# Altium PCB MAB17_sem_malha.PcbDoc (part 1 of 2)
Units mil, origin at the board's own origin, x right, y up, seen from the top; angles counter-clockwise.
Board outline 6100 x 4200 mil, 2 copper layers (Top Layer, Bottom Layer); 83 components, 57 nets, 272 pads, 21 vias.
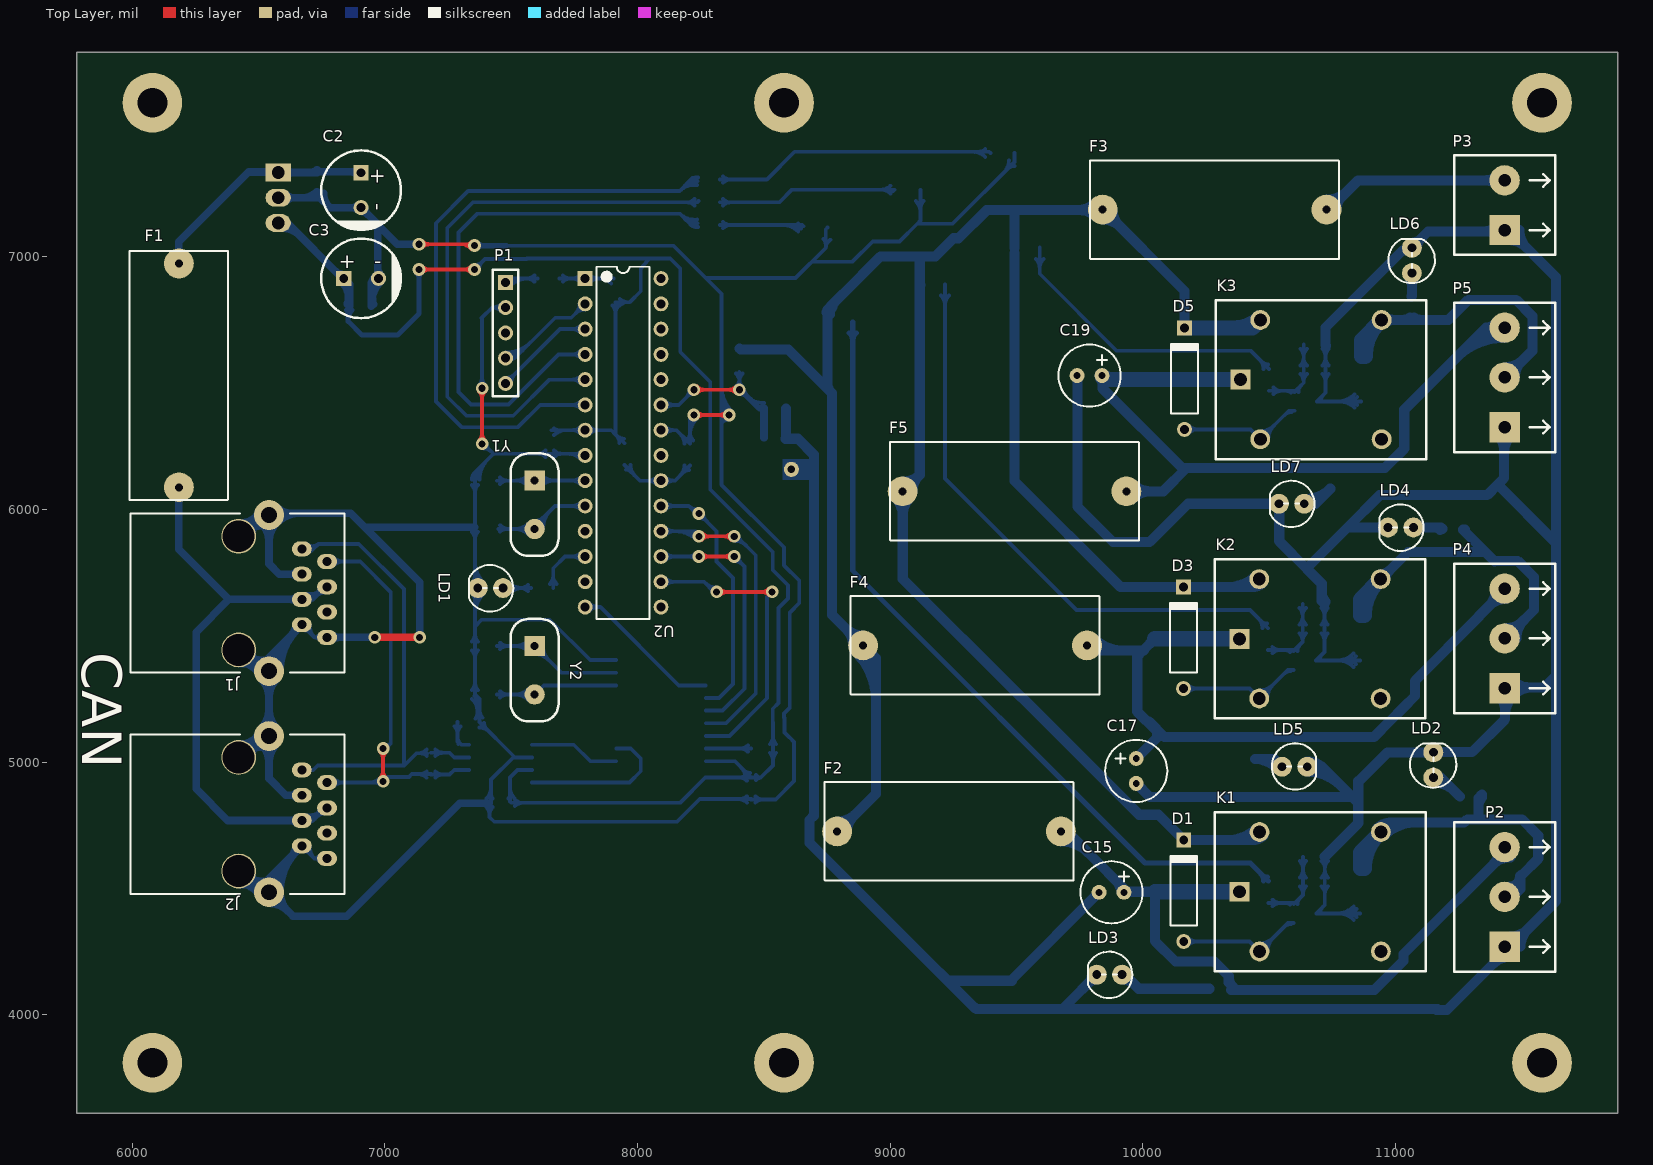
[diagram p0: Top Layer view]
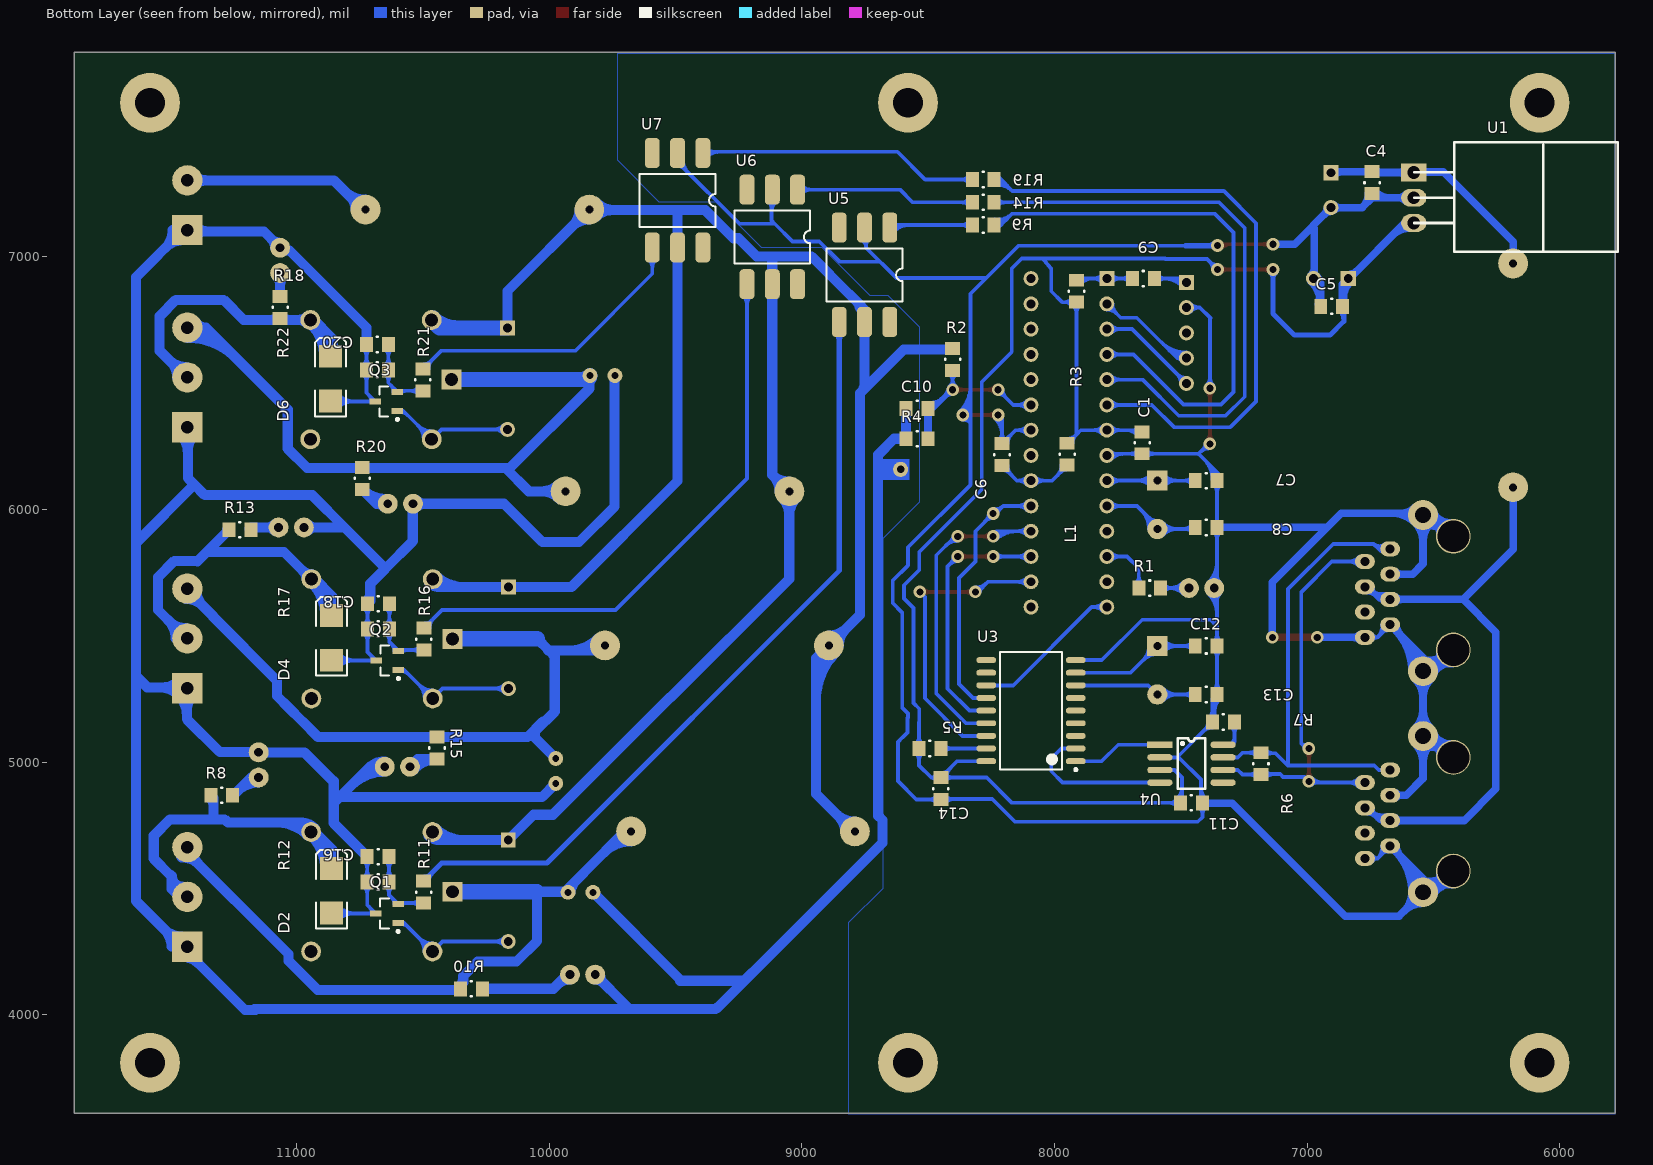
[diagram p1: Bottom Layer view, seen from below]
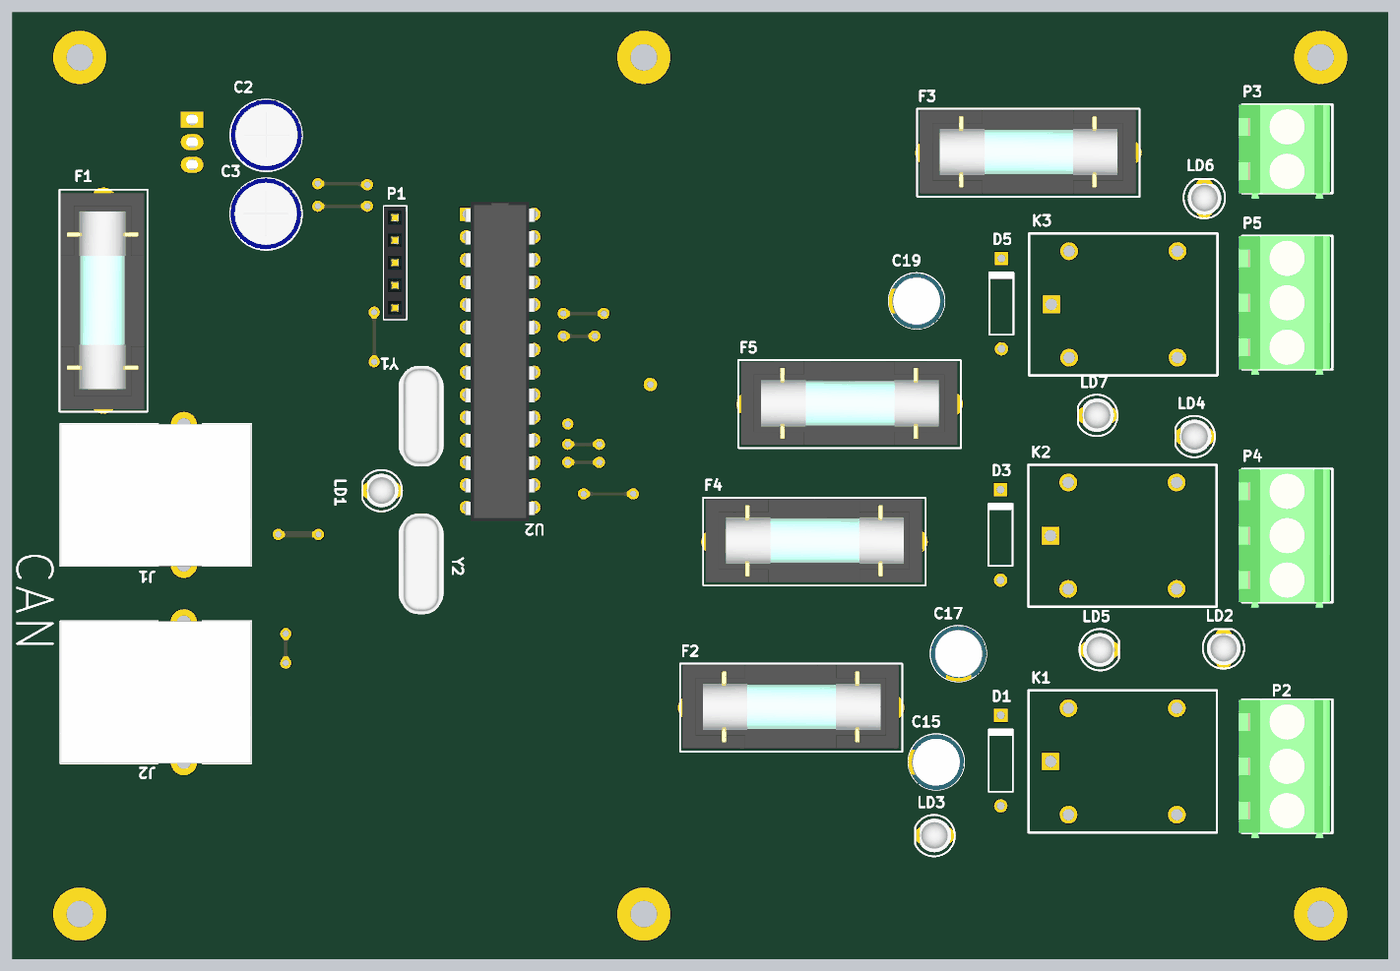
[diagram p3: 3D render of the assembled board from above, using the file's embedded part models]
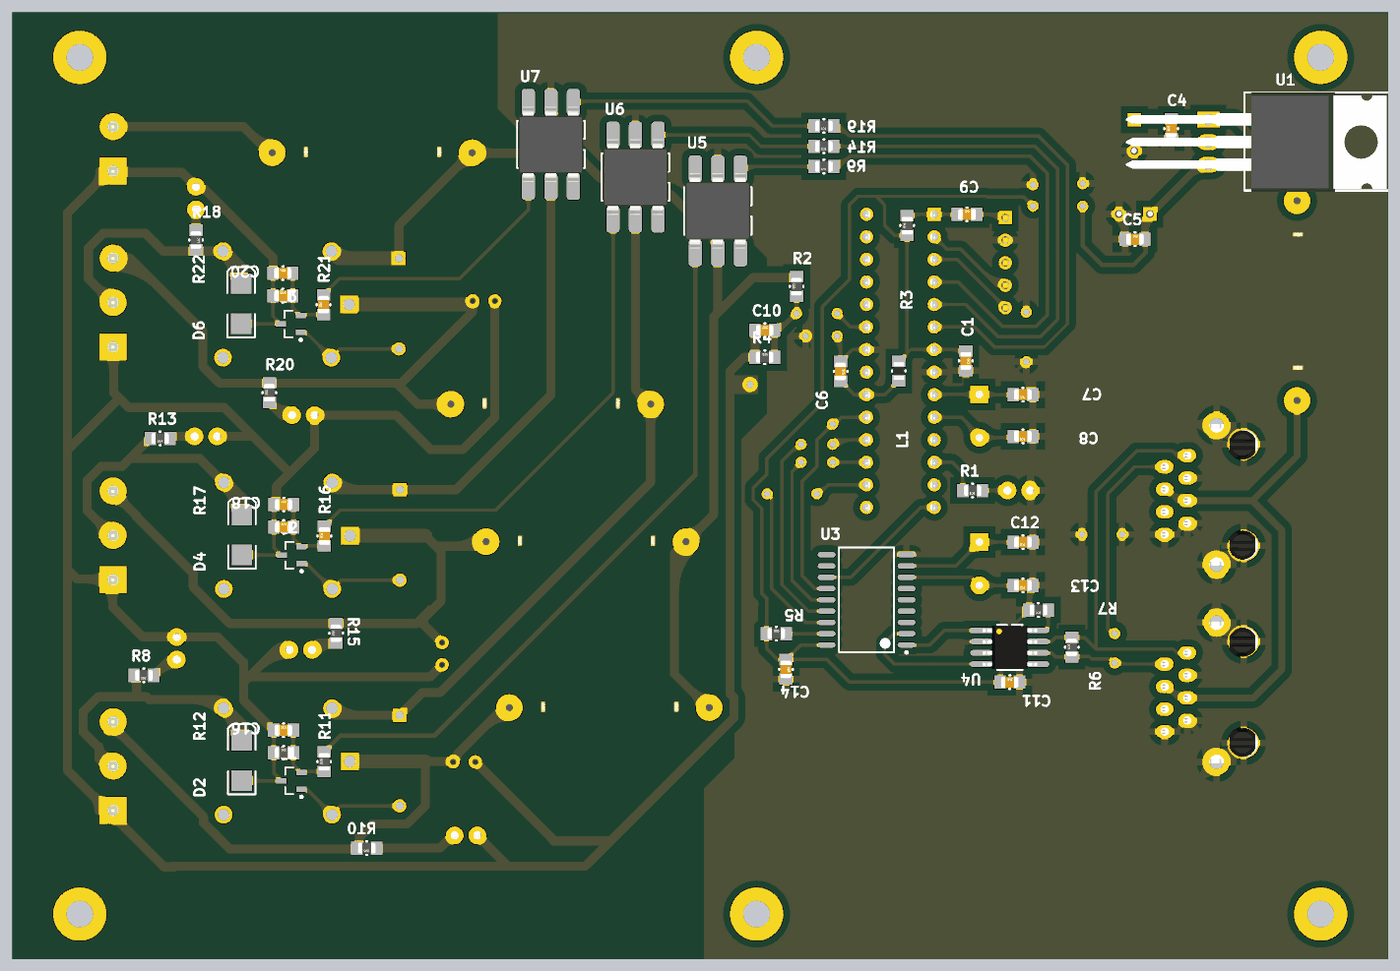
[diagram p4: 3D render of the assembled board from below, using the file's embedded part models]

## Layer stack, top to bottom
Top Layer: signal copper 1.4
Dielectric: dielectric 12.6, FR-4, Dk 4.8
Bottom Layer: signal copper 1.4

## Board outline
5780,3610 5780,7810 11880,7810 11880,3610

## Design rules (kind name [scope] priority, off if disabled: settings)
Clearance "Schematic Clearance Constraint" [InNetClass('BAT_AUX')] p1: gap=30
Clearance [All] p2: gap=30
PlaneClearance [All] p1: clearance=30
PlaneConnect [All] p1: planeconnectstyle=Relief reliefexpansion=20 reliefentries=4 reliefconductorwidth=30 reliefairgap=10
PolygonConnect [All] p1: connectstyle=Relief reliefconductorwidth=30 reliefentries=4 polygonreliefangle="90 Angle"
RoomDefinition relays [InComponentClass('relays')] p1: confinementstyle=ConfineIn formatcopy=TRUE lockcomponents=FALSE outline 0,0 2000,0 2000,1000 0,1000
RoomDefinition atmega [InComponentClass('atmega')] p2: confinementstyle=ConfineIn formatcopy=TRUE lockcomponents=FALSE outline 0,0 2000,0 2000,1000 0,1000
RoutingVias [All] p1: holewidth=31.5 width=59.06 viastyle="Through Hole" minholewidth=27.56 minwidth=50 maxholewidth=39.37 maxwidth=157.48
SilkscreenOverComponentPads [IsPad] p1: minsilkscreentomaskgap=10
SolderMaskExpansion [All] p1: expansion=4
Width "Schematic Width Constraint" [InNet('NetC19_1')] p1: maxlimit=60 minlimit=40 preferedwidth=50
Width "Schematic Width Constraint_20" [InNet('NetK3_2')] p2: maxlimit=60 minlimit=40 preferedwidth=50
Width "Schematic Width Constraint_19" [InNet('NetLD7_1')] p3: maxlimit=60 minlimit=40 preferedwidth=50
Width "Schematic Width Constraint_18" [InNet('NetK1_2')] p4: maxlimit=60 minlimit=40 preferedwidth=50
Width "Schematic Width Constraint_17" [InNet('NetF3_1')] p5: maxlimit=60 minlimit=40 preferedwidth=50
Width "Schematic Width Constraint_16" [InNet('NetD2_2')] p6: maxlimit=60 minlimit=40 preferedwidth=50
Width "Schematic Width Constraint_15" [InNet('NetLD4_1')] p7: maxlimit=60 minlimit=40 preferedwidth=50
Width "Schematic Width Constraint_14" [InNet('NetLD5_1')] p8: maxlimit=60 minlimit=40 preferedwidth=50
Width "Schematic Width Constraint_13" [InNet('+BAT_AUX')] p9: maxlimit=60 minlimit=40 preferedwidth=50
Width "Schematic Width Constraint_12" [InNet('NetK2_2')] p10: maxlimit=60 minlimit=40 preferedwidth=50
Width "Schematic Width Constraint_10" [InNet('NetLD3_1')] p11: maxlimit=60 minlimit=40 preferedwidth=50
Width "Schematic Width Constraint_9" [InNet('NetD4_2')] p12: maxlimit=60 minlimit=40 preferedwidth=50
Width "Schematic Width Constraint_8" [InNet('NetC17_1')] p13: maxlimit=60 minlimit=40 preferedwidth=50
Width "Schematic Width Constraint_7" [InNet('NetD6_2')] p14: maxlimit=60 minlimit=40 preferedwidth=50
Width "Schematic Width Constraint_6" [InNet('-BAT_AUX')] p15: maxlimit=60 minlimit=40 preferedwidth=50
Width "Schematic Width Constraint_5" [InNet('NetLD2_1')] p16: maxlimit=60 minlimit=40 preferedwidth=50
Width "Schematic Width Constraint_4" [InNet('NetLD6_1')] p17: maxlimit=60 minlimit=40 preferedwidth=50
Width "Schematic Width Constraint_3" [InNet('NetC15_1')] p18: maxlimit=60 minlimit=40 preferedwidth=50
Width [All] p19: maxlimit=30 minlimit=15 preferedwidth=20
25 further rules are at their usual default settings.

## Classes and differential pairs
net class BAT_MAIN: CAN_GND NetR9_1 NetR9_2 NetR14_1 NetR14_2 NetR19_1 NetR19_2
component class relays: C15 C16 C17 C18 C19 C20 D1 D2 D3 D4 D5 D6 F2 F3 F4 F5 K1 K2 K3 LD2 LD3 LD4 LD5 LD6 LD7 P2 P3 P4 P5 Q1 Q2 Q3 R8 R9 R10 R11 R12 R13 R14 R15 R16 R17 R18 R19 R20 R21 R22 U5 U6 U7
component class atmega: C1 C2 C3 C4 C5 C6 C7 C8 C9 C10 C11 C12 C13 C14 F1 J1 J2 L1 LD1 P1 R1 R2 R3 R4 R5 R6 R7 U1 U2 U3 U4 Y1 Y2
net class BAT_AUX: +BAT_AUX -BAT_AUX NetC15_1 NetC16_2 NetC17_1 NetC18_2 NetC19_1 NetC20_2 NetD1_1 NetD2_2 NetD3_1 NetD4_2 NetD5_1 NetD6_2 NetF3_1 NetK101_2 NetLD2_1 NetLD3_1 NetLD4_1 NetLD5_1 NetLD6_1 NetLD7_1 NetR11_2 NetR16_2 NetR21_2 NetU5_6 NetU6_4 NetU6_5 NetU6_6 NetU7_4 NetU7_5 NetU7_6

## Components (designator, comment, footprint, x,y, rotation, side; value= is the part's Value field where it differs from the comment)
C1 "100nF" 0805C 7653,6264 r270 bottom
C2 "100 uF" CP3.5mm-8.0mm 6906,7332.8 r90 top
C3 "10 uF" CP3.5mm-8.0mm 6837.1,6915 r180 top
C4 "100nF" 0805C 6743,7294 r90 bottom
C5 "100nF" 0805C 6903,6804 r180 bottom
C6 "100nF" 0805C 8208,6217.31 r270 bottom
C7 "22pF" 0805C 7399.69,6114 r0 bottom
C8 "22pF" 0805C 7399.69,5929 r0 bottom
C9 "100nF" 0805C 7648,6914 r180 bottom
C10 "100nF" 0805C 8544,6400 r180 bottom
C11 "100nF" 0805C 7458,4839 r180 bottom
C12 "22pF" 0805C 7399.69,5460.06 r0 bottom
C13 "22pF" 0805C 7399.69,5267.94 r0 bottom
C14 "100nF" 0805C 8449.69,4895.69 r270 bottom
C15 "10uF" cap10uF16V 9827,4485 r0 top
C16 "100nF" 0805C 10677,4626 r180 bottom
C17 "10uF" cap10uF16V 9974,4916 r90 top
C18 "100nF" 0805C 10676,5627 r180 bottom
C19 "10uF" cap10uF16V 9740,6530 r0 top
C20 "100nF" 0805C 10680,6653 r180 bottom
D1 "MUR120" DIO10.2-7x2.7 10162,4491 r90 top
D2 "MUR120" DSO-C2/X2.3 10862,4491 r90 bottom
D3 "MUR120" DIO10.2-7x2.7 10161,5492 r90 top
D4 "MUR120" DSO-C2/X2.3 10861,5492 r90 bottom
D5 "MUR120" DIO10.2-7x2.7 10165,6518 r90 top
D6 "MUR120" DSO-C2/X2.3 10865,6518 r90 bottom
F1 "250mA" "PORTA FUSIVEL" 6185,6973.83 r270 top
F2 "3A" "Porta Fusivel" 9676,4726 r180 top
F3 "10A" "Porta Fusivel" 10727,7187 r180 top
F4 "3A" "Porta Fusivel" 9779,5462 r180 top
F5 "3A" "Porta Fusivel" 9935,6072 r180 top
J1 "RJ45 (canbus)" "ASSMANN A-2004-2-4-LP/FS" 6423,5669 r270 top
J2 "RJ45 (canbus)" "ASSMANN A-2004-2-4-LP/FS" 6423,4794 r270 top
K1 "" RELE 10383.26,4487.22 r90 top
K2 "" RELE 10382.26,5488.22 r90 top
K3 "" RELE 10386.26,6514.22 r90 top
L1 "?H" 0805L 7948,6219 r90 bottom
LD1 "GREEN" LED3MM 7468,5689 r180 top
LD2 "RED" LED3MM 11150,4939 r90 top
LD3 "GREEN" LED3MM 9918,4159 r180 top
LD4 "RED" LED3MM 11071,5929 r180 top
LD5 "GREEN" LED3MM 10551,4982 r0 top
LD6 "RED" LED3MM 11065,6936 r90 top
LD7 "GREEN" LED3MM 10639,6023 r180 top
P1 "USART" HDR1X5 7478,6899 r270 top
P2 "KRE 3" KRE_3 11432,4270 r90 top
P3 "KRE 2" KRE_2 11432,7106 r90 top
P4 "KRE 3" KRE_3 11432,5293 r90 top
P5 "KRE 3" KRE_3 11432,6326 r90 top
Q1 "BCV27" SOT95P240-3N 10642,4401 r0 bottom
Q2 "BCV27" SOT95P240-3N 10641,5402 r0 bottom
Q3 "BCV27" SOT95P240-3N 10645,6428 r0 bottom
R1 "470R" 0805R#1 7623,5689 r0 bottom
R2 "10k" 0805R#1 8403,6594 r90 bottom
R3 "10k" 0805R#1 7913,6864 r90 bottom
R4 "4k7" 0805R#1 8544,6280 r180 bottom
R5 "10k" 0805R#1 8493,5054 r180 bottom
R6 "120R" 0805R#1 7183,4994 r90 bottom
R7 "10k" 0805R#1 7331.31,5159 r0 bottom
R8 "1k" 0805R#2 11296,4869 r180 bottom
R9 "330" 0805R#2 8282,7126 r180 bottom
R10 "1k" 0805R#2 10308,4103 r180 bottom
R11 "100R" 0805R#1 10497,4486 r90 bottom
R12 "100k" 0805R#1 10677,4526 r180 bottom
R13 "1k" 0805R#2 11224,5920 r180 bottom
R14 "330" 0805R#2 8282,7216 r180 bottom
R15 "1k" 0805R#2 10444,5056 r270 bottom
R16 "100R" 0805C 10496,5487 r90 bottom
R17 "100k" 0805C 10676,5527 r180 bottom
R18 "1k" 0805R#2 11065,6800 r90 bottom
R19 "330" 0805R#2 8282,7306 r180 bottom
R20 "1k" 0805R#2 10740,6123 r270 bottom
R21 "100R" 0805C 10500,6513 r90 bottom
R22 "100k" 0805C 10680,6553 r180 bottom
U1 "LM7805" TO220_DEITADO 6420.52,7234 r270 bottom
U2 "ATmega328P" DIP28-300(100) 7793,6914 r270 top
U3 "MCP2515-E/SO" WSO18_L 8093,5204 r0 bottom
U4 "MCP2551-I/SN" SOIC08-150(50) 7583,5069 r270 bottom
U5 "4n25" SMD-6 8652,7116 r270 bottom
U6 "4n25" SMD-6 9017,7266 r270 bottom
U7 "4n25" SMD-6 9392,7411 r270 bottom
Y1 "16MHz" HC49-US-THT 7593,6019 r270 top
Y2 "16MHz" HC49-US-THT 7593,5364 r270 top

## Footprints (in the part's own frame and the unit in brackets; to place one, negate y for a bottom-side part, rotate by r counter-clockwise, add the part's x,y. Pads: shape width x height; smd on the part's side, far side on the other; paste and mask are expansions set on the pad)
0805C [mm] "Chip Capacitor; Body 2 x 1.3 mm (LxW typ)"
  rect 1.3x1.5 smd: 1(-1.1,0) 2(1.1,0)
  silkscreen extent -0.05,-0.76 0.05,0.76, body extent -1,-0.64 1,0.62, height 0.78
0805L [mm] "Chip Inductor; Body 2 x 1.3 mm (LxW typ)"
  rect 1.3x1.5 smd: 1(-1.1,0.051) 2(1.1,0.051)
  silkscreen extent -0.05,-0.71 0.05,0.81, body extent -1,-0.56 1,0.64, height 0.95
0805R#1 [mm] "Chip Resistor; Body 2 x 1.3 mm (LxW typ)"
  rect 1.3x1.5 smd: 1(-1.1,0) 2(1.1,0)
  silkscreen extent -0.05,-0.76 0.05,0.76, body extent -1.01,-0.63 0.99,0.63, height 0.8
0805R#2 [mm] "Chip Resistor; Body 2 x 1.3 mm (LxW typ)"
  rect 1.3x1.5 smd: 1(1.1,0) 2(-1.1,0)
  silkscreen extent -0.05,-0.76 0.05,0.76, body extent -0.99,-0.63 1.01,0.63, height 0.8
"ASSMANN A-2004-2-4-LP/FS" [mm]
  oval 1.5x2 hole 0.9: 1(-4.445,6.31) 2(-3.175,8.85) 3(-1.905,6.31) 4(-0.635,8.85) 5(0.635,6.31) 6(1.905,8.85) 7(3.175,6.31) 8(4.445,8.85)
  round 3 hole 1.6: S(-7.855,3.01) S(7.845,3.01)
  round 3.5 hole 3.2: S(-5.715,-0.04) S(5.715,-0.04)
  silkscreen extent -8,-10.9 8,10.6, body extent -8,-10.9 8,10.6, height 13.6
cap10uF16V [mm]
  round 1.5 hole 0.7: 1(2.5,0) 2(0,0)
  silkscreen extent -1.88,-3.13 4.38,3.13, body extent -1.91,-3.18 4.4,3.12, height 10.51
CP3.5mm-8.0mm [mil] "Capacitor, Electrolytic, Radial; Body 8 x 10.5 mm (Dia.xH typ); Pin Spacing 3.5 mm (typ)"
  rect 60x60 hole 35: 1(0,0)
  round 60 hole 35: 2(-137.8,0)
  silkscreen extent -226,-157 89,157, body extent -226,-160 91,157, height 468
DIO10.2-7x2.7 [mm] "Diode, Axial; Body 7 x 2.7 mm (LxDia. max), Lead Dia. 0.53 mm (max)"
  round 1.5 hole 0.9: 1(-5.1,0)
  rect 1.5x1.5 hole 0.9: 2(5.1,0)
  silkscreen extent -3.5,-1.35 3.6,1.35
DIP28-300(100) [mm] "DIP, 28-Leads, Row Spacing 7.62mm, Pitch 2.54mm, Body 34.67x7.3mm"
  rect 1.5x1.5 hole 0.9: 1(0,0)
  round 1.5 hole 0.9: 2(2.54,0) 3(5.08,0) 4(7.62,0) 5(10.16,0) 6(12.7,0) 7(15.24,0) 8(17.78,0) 9(20.32,0) 10(22.86,0) 11(25.4,0) 12(27.94,0) 13(30.48,0) 14(33.02,0) 15(33.02,7.62) 16(30.48,7.62) 17(27.94,7.62) 18(25.4,7.62) 19(22.86,7.62) 20(20.32,7.62) 21(17.78,7.62) 22(15.24,7.62) 23(12.7,7.62) 24(10.16,7.62) 25(7.62,7.62) 26(5.08,7.62) 27(2.54,7.62) 28(0,7.62)
  silkscreen extent -1.19,1.16 34.21,6.46, body extent -1.4,-0.13 34.6,7.74, height 5.08
DSO-C2/X2.3 [mm] "DO-214-AA/SMB; 2 C-Bend Leads; Body 5.3 x 3.6 mm, inc. leads (LxW)"
  rect 2.3x2.3 smd: 1(-2.25,0) 2(2.25,0)
  silkscreen extent -3.8,-1.55 4.1,1.55
HC49-US-THT [mil] "THT Quartz Crystal"
  rect 80x80 hole 32: 1(-96.06,0)
  round 80 hole 32: 2(96.06,0)
  silkscreen extent -203,-94 203,94, body extent -223,-91 224,92, height 138
HDR1X5 [mm] "Connector; Header; 5 Position"
  rect 1.5x1.5 hole 0.9: 1(0,0)
  round 1.5 hole 0.9: 2(2.54,0) 3(5.08,0) 4(7.62,0) 5(10.16,0)
  silkscreen extent -1.27,-1.27 11.43,1.27, body extent -1.27,-1.27 11.43,1.23, height 8.4
KRE_2 [mil] "Terminal Block 2 pins"
  rect 120x120 hole 50: 1(0,0)
  round 120 hole 50: 2(196.85,0)
  silkscreen extent -98,-200 295,200, body extent -123,-190 294,216, height 559
KRE_3 [mil] "Terminal Block 3 pins"
  rect 120x120 hole 50: 1(0,0)
  round 120 hole 50: 2(196.85,0) 3(393.7,0)
  silkscreen extent -100,-200 492,200, body extent -123,-190 491,216, height 559
LED3MM [mm]
  round 2 hole 0.889: 1(0,0) 2(2.54,0)
  silkscreen extent -1.03,-2.31 3.43,2.36, body extent -0.63,-1.9 2.87,1.9, height 5.5
"PORTA FUSIVEL" [mm]
  round 3 hole 0.8: 1(0,0) 2(22.5,0)
  silkscreen extent -1.27,-4.95 23.77,4.95, body extent -0.9,-4.8 23.5,4.6, height 12.6
"Porta Fusivel" [mm]
  round 3 hole 0.8: 1(0,0) 2(22.5,0)
  silkscreen extent -1.27,-4.95 23.77,4.95, body extent -0.9,-4.8 23.5,4.6, height 12.6
RELE [mm]
  rect 2x2 hole 1.3: 1(0,0)
  round 2 hole 1.3: 2(-6,-14.2) 3(6,-14.2) 4(6,-2) 5(-6,-2)
  silkscreen extent -8,-18.7 8,2.5, body extent -8.01,-18.66 8,2.52, height 15.4
SMD-6 [mm]
  rrect50% 3x1.5 smd: 1(0,0) 2(0,-2.54) 3(0,-5.08) 4(9.5,-5.08) 5(9.5,-2.54) 6(9.5,0)
  silkscreen extent 2.08,-6.35 7.41,1.27, body extent -0.33,-6.2 9.83,1.09, height 3.51
SOIC08-150(50) [mil] "SOIC; 8 Leads; Row Spacing 3.81 mm; Pitch 1.27 mm; 3D Antonio Fagaldo"
  rect 25x100 smd: 1(0,0)
  oval 25x100 smd: 2(50,0) 3(100,0) 4(150,0) 5(150,250) 6(100,250) 7(50,250) 8(0,250)
  silkscreen extent -25,70 175,180, body extent -20,4 173,246, height 69
SOT95P240-3N [mm] "SOT23, 3-Leads, Body 2.9x1.3mm, Pitch 0.95mm, Lead Span 2.4mm, IPC Medium Density"
  rect 1.15x0.6 smd: 1(-1.125,0.95) 2(-1.125,-0.95) 3(1.125,0)
  silkscreen extent -1.25,-1.5 0.7,1.92, body extent -0.7,-1.5 0.7,1.5, height 1.14
TO220_DEITADO [mil]
  rect 70x100 hole 50: 1(-100,-157.48)
  oval 70x100 hole 50: 2(0,-157.48) 3(100,-157.48)
  silkscreen extent -220,-155 214,650, body extent -221,-522 220,632, height 185
WSO18_L [mm] "18-Pin Small Outline Integrated Circuit 1.27 mm Pitch, IPC High Density"
  oval 2x0.6 smd: 1(-4.5,5.08) 2(-4.5,3.81) 3(-4.5,2.54) 4(-4.5,1.27) 5(-4.5,0) 6(-4.5,-1.27) 7(-4.5,-2.54) 8(-4.5,-3.81) 9(-4.5,-5.08) 10(4.5,-5.08) 11(4.5,-3.81) 12(4.5,-2.54) 13(4.5,-1.27) 14(4.5,0) 15(4.5,1.27) 16(4.5,2.54) 17(4.5,3.81) 18(4.5,5.08)
  silkscreen extent -4.62,-5.9 3.1,6.05, body extent -3.8,-5.95 3.8,5.95, height 2.65

## Part data
C1 C4 C5 C6 C7 C8 C9 C10 C11 C12 C13 C14: library part Cap_0805, "Capacitor"
C2 C3: library part CapacitorPol, "Solid Aluminum Capacitor with Organic Semiconductor Electrolyte: 100uF, 10V, Bulk Pack"
C15 C17 C19: library part "Cap Pol1", "Polarized Capacitor (Radial)"
C16 C18 C20: library part Cap, "Capacitor"
D1 D2 D3 D4 D5 D6: library part Diode, "Default Diode"
F1: library part "Fuse 1", "Fuse"
F2 F3 F4 F5: library part "Fuse 1", "Fuse 5x20"
J1 J2: library part "Modular Jack with Shield", "YH-59-01"
K1 K2 K3: library part Relay, "SPDT Relay"
L1: library part Ind_0805, "Inductor"
LD1 LD2 LD3 LD4 LD5 LD6 LD7: library part LED_0805, "LED"
P1: library part "Header 5", "Header, 5-Pin"
P2 P4 P5: library part "Header 3", "Header, 3-Pin"
P3: library part KRE_2, "Terminal Block 1x2"
Q1 Q2 Q3: library part NPN1, "NPN Darlington Bipolar Transistor"
R1 R2 R3 R4 R5 R6 R7: library part Res_0805, "Resistor"
R8 R9 R10 R11 R12 R13 R14 R15 R16 R17 R18 R19 R20 R21 R22: library part Res1, "Resistor"
U1: library part µA7805CKC, "Positive-Voltage Regulator"
U2: "8-bit AVR Microcontroller, 32KB Flash, 1KB EEPROM, 2KB SRAM, 28-pin PDIP, Industrial Grade (-40°C to 85°C)"
U3: library part CMP-0186-00035-2, "Stand-Alone CAN Controller With SPI Interface, 18-Pin SOIC, Extended Temperature"
U4: library part CMP-1721-00003-1
U5 U6 U7: library part Optoisolator2, "5 Pin Mini Flat Pack Optocoupler"
Y1 Y2: library part Crystal, "Crystal"

## Free pads (board coordinates)
  round 60 hole 30: 11(8609,6159)
  round 236.22 hole 118.11 unplated: 14(6080,3810) 14(6080,7610) 14(11580,3810) 14(11580,7610) 16(8580,3810) 18(8580,7610)

## Via types
v1: diameter 50, hole 28, Top Layer to Bottom Layer, 21 vias

## Nets (pads, with @x,y where several pads share a name; then routed paths per layer and width w, separated by ;. In a path a pad name is that pad's centre, name@x,y a point inside that pad or via, vN(x,y) a via of type N, cw(c..) or ccw(c..) an arc to the next point about the centre after c; other vN are vias at no path point)
+5V: C1.1 C3.1 C5.2 C11.1 C14.1 L1.2 R3.1 R5.1 U1.3 U2.7 U3.18 U4.3 | length 8370.6
  Top Layer w15: v1(7135,6950) v1(7355,6950) ; v1@7147.37,6937.63 cw(c7177.25,6907.75) 7177.25,6950 cw(c7177.25,6992.25) v1@7147.37,6962.37 ; v1@7342.63,6937.63 ccw(c7312.75,6907.75) 7312.75,6950 ccw(c7312.75,6992.25) v1@7342.63,6962.37
  Bottom Layer w15: v1(7355,6950) 7342,6950 7337,6955 7360,6955 7396.5,6991.5 7560.25,6991.5 7562.75,6994 8048,6994 ; v1@7355,6967.5 ccw(c7355,7009.75) 7384.87,6979.87 ccw(c7414.75,6950) v1@7372.5,6950 ; C11.1@7488.52,4855.73 ccw(c7471.65,4872.59) 7495.5,4872.59 ; C11.1@7495.5,4844.81 7495.5,4939.71 7524.79,4969 U4.3@7583,4969 ; 7495.5,4900.63 ccw(c7559,4900.63) C11.1@7514.1,4855.73 ; C11.1@7501.31,4839 8168,4839 8268,4939 C14.1@8449.69,4939 ; C11.1@7514.1,4826.21 cw(c7544.98,4795.33) 7544.98,4839 cw(c7544.98,4882.67) C11.1@7514.1,4851.79 ; C1.1@7659.69,6314 U2.7@7793,6314 7896.31,6314 7913,6297.31 ; C1.1@7669.73,6294.52 cw(c7716.77,6247.47) 7716.77,6314 ; C1.1@7669.73,6320.1 ccw(c7684.45,6334.82) 7684.45,6314 ; U2.7@7777.42,6298.42 ccw(c7739.82,6260.82) 7739.82,6314 ccw(c7739.82,6367.18) U2.7@7777.42,6329.58 ; U2.7@7808.58,6298.42 cw(c7846.18,6260.82) 7846.18,6314 cw(c7846.18,6367.18) U2.7@7808.58,6329.58 ; R3.1@7900.21,6807.9 cw(c7869.33,6777.02) 7913,6777.02 cw(c7956.67,6777.02) R3.1@7925.79,6807.9 ; 7913.81,6296.5 cw(c7879.62,6262.31) L1.2@7927.97,6262.31 ; 7918.49,6291.82 ccw(c7946.06,6319.4) L1.2@7946.06,6280.4 ; R3.1@7929.73,6807.9 cw(c7960.61,6777.02) 7960.61,6820.69 cw(c7960.61,6864.37) R3.1@7929.73,6833.48 ; L1.2@7948,6262.31 7913,6297.31 ; U3.18@8270.17,5004 8384.69,5004 C14.1@8449.69,4939 ; 8412.09,4976.6 cw(c8374.49,4939) C14.1@8427.67,4939 ; 8421.59,4967.1 ccw(c8445.76,4991.26) C14.1@8445.76,4957.09 ; C14.1@8432.96,4926.21 ccw(c8402.08,4895.33) 8402.08,4939 ccw(c8402.08,4982.67) C14.1@8432.96,4951.79 ; C14.1@8468.54,4928.76 cw(c8488,4915.4) 8488,4939 ; C14.1@8468.54,4949.24 ccw(c8488,4962.6) 8488,4939 ; R5.1@8523.52,5037.27 cw(c8492.63,5006.39) 8536.31,5006.39 cw(c8579.98,5006.39) R5.1@8549.1,5037.27 ; R5.1@8523.52,5070.73 ccw(c8492.63,5101.61) 8536.31,5101.61 ccw(c8579.98,5101.61) R5.1@8549.1,5070.73 ; 7913,6297.31 R3.1@7913,6820.69 7969.69,6820.69 8013,6864 8013,6954 8048,6994 ; 8048,6994 8129.36,6994 8169,6954.36 8169,6624 8288,6505 8288,6079 8535,5832 8535,5760.39 8595.5,5699.89 8595.5,5648.11 8558,5610.61 8558,5234.44 8535,5211.44 8535,5158.61 8536.31,5157.31 R5.1@8536.31,5054 8536.31,4987.31 8488,4939 ; C14.1@8449.69,4939 8488,4939
  Bottom Layer w20: C5.2@6848.67,6789.04 cw(c6833.38,6773.75) 6855,6773.75 ; 6855,6751.09 cw(c6908.66,6751.09) C5.2@6870.72,6789.04 ; C5.2@6855,6805 6855,6745 6910,6690 7050,6690 7135,6775 v1(7135,6950) ; v1@7124.39,6939.39 cw(c7098.79,6913.79) 7135,6913.79 cw(c7171.21,6913.79) v1@7145.61,6939.39
  Bottom Layer w30: U1.3@6583,7134 6614.1,7134 C3.1@6834.1,6914 ; U1.3@6593,7114 cw(c6593,7014.77) 6663.17,7084.94 ; 6804.67,6943.44 ccw(c6837.1,6975.87) C3.1@6837.1,6930 ; C3.1@6826.5,6904.39 cw(c6745.61,6823.51) C5.2@6860,6823.51 ; C3.1@6837.1,6915 6860,6892.1 C5.2@6860,6805 ; C5.2@6850.52,6813.23 ccw(c6815.59,6833.4) 6854.55,6843.84 ; C5.2@6852.2,6815.43 ccw(c6833.38,6834.25) 6860,6834.25
+5V_ADC: C6.2 L1.1 U2.20 | length 614.7
  Bottom Layer w15: L1.1@7948,6175.69 8009.69,6114 U2.20@8093,6114 8148,6114 C6.2@8208,6174 ; L1.1@7953.94,6157.6 cw(c7953.94,6128.26) 7974.68,6149.01 ; L1.1@7972.03,6175.69 ccw(c8030.03,6175.69) 7989.02,6134.68 ; U2.20@8077.42,6098.42 ccw(c8039.82,6060.82) 8039.82,6114 ccw(c8039.82,6167.18) U2.20@8077.42,6129.58 ; U2.20@8108.58,6098.42 cw(c8146.18,6060.82) 8146.18,6114 cw(c8146.18,6167.18) U2.20@8108.58,6129.58 ; 8170.4,6136.4 ccw(c8132.79,6174) C6.2@8185.97,6174 ; 8179.9,6145.9 cw(c8204.06,6121.74) C6.2@8204.06,6155.91
+18V: C2.1 C4.2 F1.1 U1.1 | length 1056.5
  Bottom Layer w30: F1.1@6185,6973.83 6185,7060 6461,7336 U1.1@6579,7336 ; U1.1@6578,7334 C4.2@6733,7334 ; U1.1@6607.14,7319.86 cw(c6641.28,7285.72) 6641.28,7334 cw(c6641.28,7382.28) U1.1@6607.14,7348.14 ; 6705.51,7334 ccw(c6705.51,7370.86) C4.2@6731.57,7344.8 ; C4.2@6743,7337.31 C2.1@6904.69,7337.31 ; 6858.89,7337.31 cw(c6858.89,7285.69) C2.1@6895.39,7322.19
+18V_PRE: F1.2 J1.4 J1.5 J2.4 J2.5 | length 3094.8
  Bottom Layer w15: J2.5@6671.43,4769 6716.79,4769 ; J1.5@6671.43,5644 6716.79,5644 ; J2.5@6680.24,4761.09 ccw(c6686.93,4812.62) 6723.67,4775.88 ; J1.5@6680.24,5636.09 ccw(c6686.93,5687.62) 6723.67,5650.88 ; J2.5@6682.17,4775.97 ccw(c6691.88,4850.79) J2.4@6745.23,4797.44 ; J1.5@6682.17,5650.97 ccw(c6691.88,5725.79) J1.4@6745.23,5672.44 ; J2.5@6684.1,4790.84 ccw(c6696.84,4888.95) J2.4@6766.79,4819 ; J1.5@6684.1,5665.84 ccw(c6696.84,5763.95) J1.4@6766.79,5694 ; J2.5@6701,4759.21 cw(c6716.79,4751.37) 6716.79,4769 ; J2.5@6701,4778.79 ccw(c6716.79,4786.63) 6716.79,4769 ; J1.5@6701,5634.21 cw(c6716.79,5626.37) 6716.79,5644 ; J1.5@6701,5653.79 ccw(c6716.79,5661.63) 6716.79,5644 ; 6720.3,4772.5 ccw(c6673.8,4819) J2.4@6739.56,4819 ; 6720.3,5647.5 ccw(c6673.8,5694) J1.4@6739.56,5694 ; 6732.87,4785.08 cw(c6761.58,4756.37) J2.4@6761.58,4796.97 ; 6732.87,5660.08 cw(c6761.58,5631.37) J1.4@6761.58,5671.97 ; J2.4@6771.43,4819 J2.4@6766.79,4819 ; J1.4@6771.43,5694 J1.4@6766.79,5694 ; 6716.79,4769 J2.4@6766.79,4819 ; 6716.79,5644 J1.4@6766.79,5694
  Bottom Layer w30: F1.2@6184,6083 6184,5843 6383,5644 ; J2.5@6651.31,4758.73 ccw(c6626.51,4733.93) 6626.51,4769 ccw(c6626.51,4804.07) J2.5@6651.31,4779.27 ; J1.5@6651.31,5633.73 ccw(c6626.51,5608.93) 6626.51,5644 ccw(c6626.51,5679.07) J1.5@6651.31,5654.27 ; J2.5@6671.43,4769 6378,4769 6253,4894 6253,5514 6383,5644 ; J1.5@6671.43,5644 6383,5644
+BAT_AUX: D1.2 D3.2 D5.2 F2.2 F3.2 F4.2 F5.2 K1.4 K2.4 K3.4 R2.2 U5.5 U6.5 U7.5 | length 12062.5
  Bottom Layer w40: R2.2@8403,6637.31 8407.38,6632.93 8597.07,6632.93 8770,6460 8770,5583 F4.2@8890,5463 ; U5.5@8748.99,6780.55 ccw(c8738.17,6813.1) 8772.47,6813.1 ; U5.5@8749.13,6780.6 ccw(c8739.04,6812.47) 8772.47,6812.47 ; 8755,6480 8752,6483 U5.5@8752,6741.98 8752,6792 8772.47,6812.47 ; U5.5@8761.27,6773.7 cw(c8802.22,6783.35) 8772.47,6813.1 ; U5.5@8761.29,6773.63 cw(c8802,6782.94) 8772.47,6812.47 ; U5.5@8761.53,6771.51 cw(c8835.51,6771.51) 8783.2,6823.83 ; F2.2@8788,4719 8944,4875 8944,5411.17 F4.2@8893.17,5462 ; F2.2@8790.17,4765.06 ccw(c8790.17,4871) 8865.08,4796.08 ; 8822.79,5530.21 ccw(c8893.17,5600.59) F4.2@8893.17,5501.06 ; 8828.04,5524.96 cw(c8765.08,5462) F4.2@8854.12,5462 ; F2.2@8829.23,4726 cw(c8911.86,4726) 8853.43,4784.43 ; F4.2@8865.56,5434.38 cw(c8676.18,5245.01) 8944,5245.01 ; F4.2@8893.84,5462.67 cw(c8772.75,5341.57) 8944,5341.57 ; F5.2@9021.56,6044.38 cw(c8952.89,5975.72) 9050,5975.72 ; F5.2@9049.17,6072 F5.2@9052,6072 ; 9050,5979.71 cw(c9141.46,5979.71) F5.2@9076.79,6044.38 ; F5.2@9050.69,6111.03 ccw(c9054.14,6199.86) 9117,6137 ; F5.2@9088.23,6072 cw(c9175.69,6072) 9113.85,6133.85 ; 9112,7001 9058.63,7001 9058.59,7001.04 8961.04,7001.04 8811.04,6851.04 8810.41,6851.04 8772.47,6813.1 ; 9112.04,7001.04 9178.36,7001.04 9250.82,7073.5 9270.82,7073.5 9382.32,7185 ; 9117,6992 U6.5@9117,6891.98 ; U6.5@9120,6889 U6.5@9117,6891.98 ; 9385,7185 9495,7185 ; U7.5@9492,7016 9492,6113 9912.21,5692.79 D3.2@10161,5692.79 10437.79,5692.79 K2.4@10470,5725 ; U7.5@9492,7036 U7.5@9492,7036.98 9492,7182 9495,7185 ; 9742.06,7185 ccw(c9742.06,7286.12) F3.2@9813.56,7214.62 ; 9751.71,7185 cw(c9751.71,7097.54) F3.2@9813.56,7159.38 ; F3.2@9840,7190 10165,6865 D5.2@10165,6718.79 ; F3.2@9841.17,7147.94 cw(c9841.17,7049.25) 9910.96,7119.04 ; F3.2@9841.17,7185 9495,7185 ; F3.2@9880.23,7187 ccw(c9970.11,7187) 9906.55,7123.45 ; 10337.82,5692.79 ccw(c10337.82,5847.63) K2.4@10447.3,5738.14 ; 10338.82,4691.79 ccw(c10338.82,4846.63) K1.4@10448.3,4737.14 ; 10434.38,5692.79 ccw(c10434.38,5751.06) K2.4@10475.59,5709.85 ; 10435.38,4691.79 ccw(c10435.38,4750.06) K1.4@10476.59,4708.85 ; K1.4@10465,4725 10431.79,4691.79 D1.2@10162,4691.79 10061.79,4792 9985.53,4792 9519,5258.53 9516.47,5258.53 9050,5725 9050,6070 F5.2@9052,6072 ; 8772.47,6812.47 8772.47,6813.1 ; F5.2@9052,6072 9117,6137 ; 9117,6137 U6.5@9117,6891.98
  Bottom Layer w60: F3.2@9841.17,7185 F3.2@9841.17,7187 ; D5.2@10165,6718.79 10433.79,6718.79 K3.4@10460,6745 ; 10365.96,6718.79 ccw(c10365.96,6849.48) K3.4@10458.37,6757.07
-BAT_AUX: C10.1 C15.2 C16.1 C17.2 C18.1 C19.2 C20.1 D2.1 D4.1 D6.1 LD2.2 LD3.2 LD4.2 LD5.2 LD6.2 LD7.2 P2.1 P3.1 P4.1 P5.1 pad.11 Q1.3 Q2.3 Q3.3 R4.1 R12.1 R17.1 R22.1 | length 20257.9
  Bottom Layer w0: 10999,5043 10999,5044
  Bottom Layer w15: Q2.3@10700.43,5402 cw(c10736.98,5402) 10711.13,5427.84 ; Q1.3@10701.43,4401 cw(c10737.98,4401) 10712.13,4426.84 ; Q3.3@10704.43,6428 cw(c10740.98,6428) 10715.13,6453.84 ; R17.1@10706.52,5510.27 cw(c10675.63,5479.39) 10719.31,5479.39 cw(c10762.98,5479.39) R17.1@10732.1,5510.27 ; R17.1@10706.52,5543.73 ccw(c10675.63,5574.61) 10719.31,5574.61 ccw(c10762.98,5574.61) R17.1@10732.1,5543.73 ; C18.1@10706.52,5610.27 cw(c10675.63,5579.39) 10719.31,5579.39 cw(c10762.98,5579.39) C18.1@10732.1,5610.27 ; R12.1@10707.52,4509.27 cw(c10676.63,4478.39) 10720.31,4478.39 cw(c10763.98,4478.39) R12.1@10733.1,4509.27 ; R12.1@10707.52,4542.73 ccw(c10676.63,4573.61) 10720.31,4573.61 ccw(c10763.98,4573.61) R12.1@10733.1,4542.73 ; C16.1@10707.52,4609.27 cw(c10676.63,4578.39) 10720.31,4578.39 cw(c10763.98,4578.39) C16.1@10733.1,4609.27 ; R22.1@10710.52,6536.27 cw(c10679.63,6505.39) 10723.31,6505.39 cw(c10766.98,6505.39) R22.1@10736.1,6536.27 ; R22.1@10710.52,6569.73 ccw(c10679.63,6600.61) 10723.31,6600.61 ccw(c10766.98,6600.61) R22.1@10736.1,6569.73 ; C20.1@10710.52,6636.27 cw(c10679.63,6605.39) 10723.31,6605.39 cw(c10766.98,6605.39) C20.1@10736.1,6636.27 ; C18.1@10719.31,5627 R17.1@10719.31,5527 10719.31,5436.02 Q2.3@10685.29,5402 D4.1@10859.58,5402 ; C16.1@10720.31,4626 R12.1@10720.31,4526 10720.31,4435.02 Q1.3@10686.29,4401 D2.1@10860.58,4401 ; C20.1@10723.31,6653 10723.31,6650.69 R22.1@10723.31,6553 10723.31,6462.02 Q3.3@10689.29,6428 D6.1@10863.58,6428 ; 10766.38,5402 ccw(c10766.38,5498.04) D4.1@10834.29,5430.13 ; 10767.38,4401 ccw(c10767.38,4497.04) D2.1@10835.29,4429.13 ; 10770.38,6428 ccw(c10770.38,6524.04) D6.1@10838.29,6456.13 ; 10773.22,5402 cw(c10773.22,5315.64) D4.1@10834.29,5376.71 ; 10774.22,4401 cw(c10774.22,4314.64) D2.1@10835.29,4375.71 ; 10777.22,6428 cw(c10777.22,6341.64) D6.1@10838.29,6402.71 ; 10802.59,5402 ccw(c10802.59,5461.82) D4.1@10844.9,5419.52 ; 10803.59,4401 ccw(c10803.59,4460.82) D2.1@10845.9,4418.52 ; 10806.59,6428 ccw(c10806.59,6487.82) D6.1@10848.9,6445.52 ; 10809.44,5402 cw(c10809.44,5351.85) D4.1@10844.9,5387.31 ; 10810.44,4401 cw(c10810.44,4350.85) D2.1@10845.9,4386.31 ; 10813.44,6428 cw(c10813.44,6377.85) D6.1@10848.9,6413.31
  Bottom Layer w40: R4.1@8586,6280 R4.1@8587.31,6280 R4.1@8594,6280 ; C10.1@8587.31,6400 8587.31,6286.69 R4.1@8594,6280 ; 9195,4168 9228,4135 9482,4135 9482,4140 C15.2@9827,4485 ; 9694,4033 9694,4035 LD3.2@9818,4159 ; C19.2@9741,6530 9741,6012 9882,5871 10027,5871 10179,6023 LD7.2@10539,6023 ; LD3.2@9798.63,4159 cw(c9751.87,4159) 9784.93,4125.93 cw(c9818,4092.87) LD3.2@9818,4139.63 ; C17.2@9974,4916 10028,4862 10829,4862 ; LD7.2@10525.3,6009.3 ccw(c10492.24,5976.24) 10492.24,6023 ccw(c10492.24,6069.76) LD7.2@10525.3,6036.7 ; LD7.2@10540,6020 10540,5874.81 10647.91,5766.91 ; LD5.2@10651,4962.63 cw(c10651,4775.84) 10783.08,4907.92 ; LD5.2@10651,4982 10709,4982 10829,4862 ; LD5.2@10651,5002.63 cw(c10651,4912.41) 10714.79,4976.21 ; LD5.2@10664.7,4968.3 cw(c10697.76,4935.24) 10697.76,4982 cw(c10697.76,5028.76) LD5.2@10664.7,4995.7 ; 10708.28,5671.05 ccw(c10759.42,5671.05) C18.1@10723.26,5634.89 ; C18.1@10719.31,5627 10708.28,5638.02 10708.28,5706.53 10648.91,5765.91 10647.91,5766.91 ; C16.1@10720.31,4626 10852.94,4758.64 10852.94,4838.06 ; C20.1@10725,6647 10725,6649 10723.31,6650.69 10723,6651 10723,6720.39 11027.98,7025.37 11054.37,7025.37 LD6.2@11065,7036 11129,7100 P3.1@11455,7100 ; 10852.94,4925.94 10852.94,4838.06 ; 10855,4925 10969,5039 LD2.2@11150,5039 ; LD4.2@10957.3,5915.3 ccw(c10924.24,5882.24) 10924.24,5929 ccw(c10924.24,5975.76) LD4.2@10957.3,5942.7 ; LD4.2@10971,5929 10810,5929 ; LD6.2@11065,7055.37 ccw(c11065,7102.13) 11098.07,7069.07 ccw(c11131.13,7036) LD6.2@11084.37,7036 ; LD2.2@11150,5040 11303.61,5040 11434,5170.39 11434,5296 11591,5296 11635,5340 ; 11338.95,7100 ccw(c11338.95,7217.05) P3.1@11421.72,7134.28 ; 11367.92,7100 cw(c11367.92,7023.92) P3.1@11421.72,7077.72 ; P5.1@11403.72,6297.72 cw(c11340.26,6234.26) 11430,6234.26 ; P4.1@11409.72,5264.72 cw(c11351.09,5206.09) 11434,5206.09 ; P2.1@11415,4270 cw(c11318.43,4270) 11386.72,4201.72 cw(c11455,4133.43) P2.1@11455,4230 ; 11430,6224.6 cw(c11533.4,6224.6) P5.1@11460.28,6297.72 ; P5.1@11430,6325 11430,6124 11405,6099 ; 11434,5186.77 cw(c11544.23,5186.77) 11466.28,5264.72 cw(c11541.81,5189.19) 11541.81,5296 ; P3.1@11445,7110 P3.1@11455,7100 ; P3.1@11450,7066 cw(c11450,6971.85) 11516.58,7038.42 ; P2.1@11455,4310 ccw(c11455,4406.57) 11523.28,4338.28 ccw(c11591.57,4270) 11495,4270 ; P3.1@11460,7100 P3.1@11455,7100 ; P4.1@11466.28,5321.28 ccw(c11527.33,5382.33) 11527.33,5296 ; P3.1@11490,7106 ccw(c11588.98,7106) 11518.99,7036.01 ; R4.1@8594,6280 8635,6280 8698,6217 8698,4788.05 8681.12,4771.17 8681.12,4680.83 9333.95,4028 9336,4028 9341,4023 11167,4023 11163,4019 11204,4019 11635,4450 11635,5340 ; 10647.91,5766.91 10810,5929 ; 10810,5929 10938,6057 11363,6057 11405,6099 ; 10829,4862 10837,4854 10852.94,4838.06 ; 11405,6099 11635,5869 ; P3.1@11455,7100 11635,6920 11635,5869 ; 11635,5340 11635,5869